# Altium PCB O2 level.PcbDoc
Units mil, origin at the board's own origin, x right, y up, seen from the top; angles counter-clockwise.
Board outline 5000 x 5000 mil, 2 copper layers (Top Layer, Bottom Layer); 23 components, 24 nets, 120 pads, 5 vias.
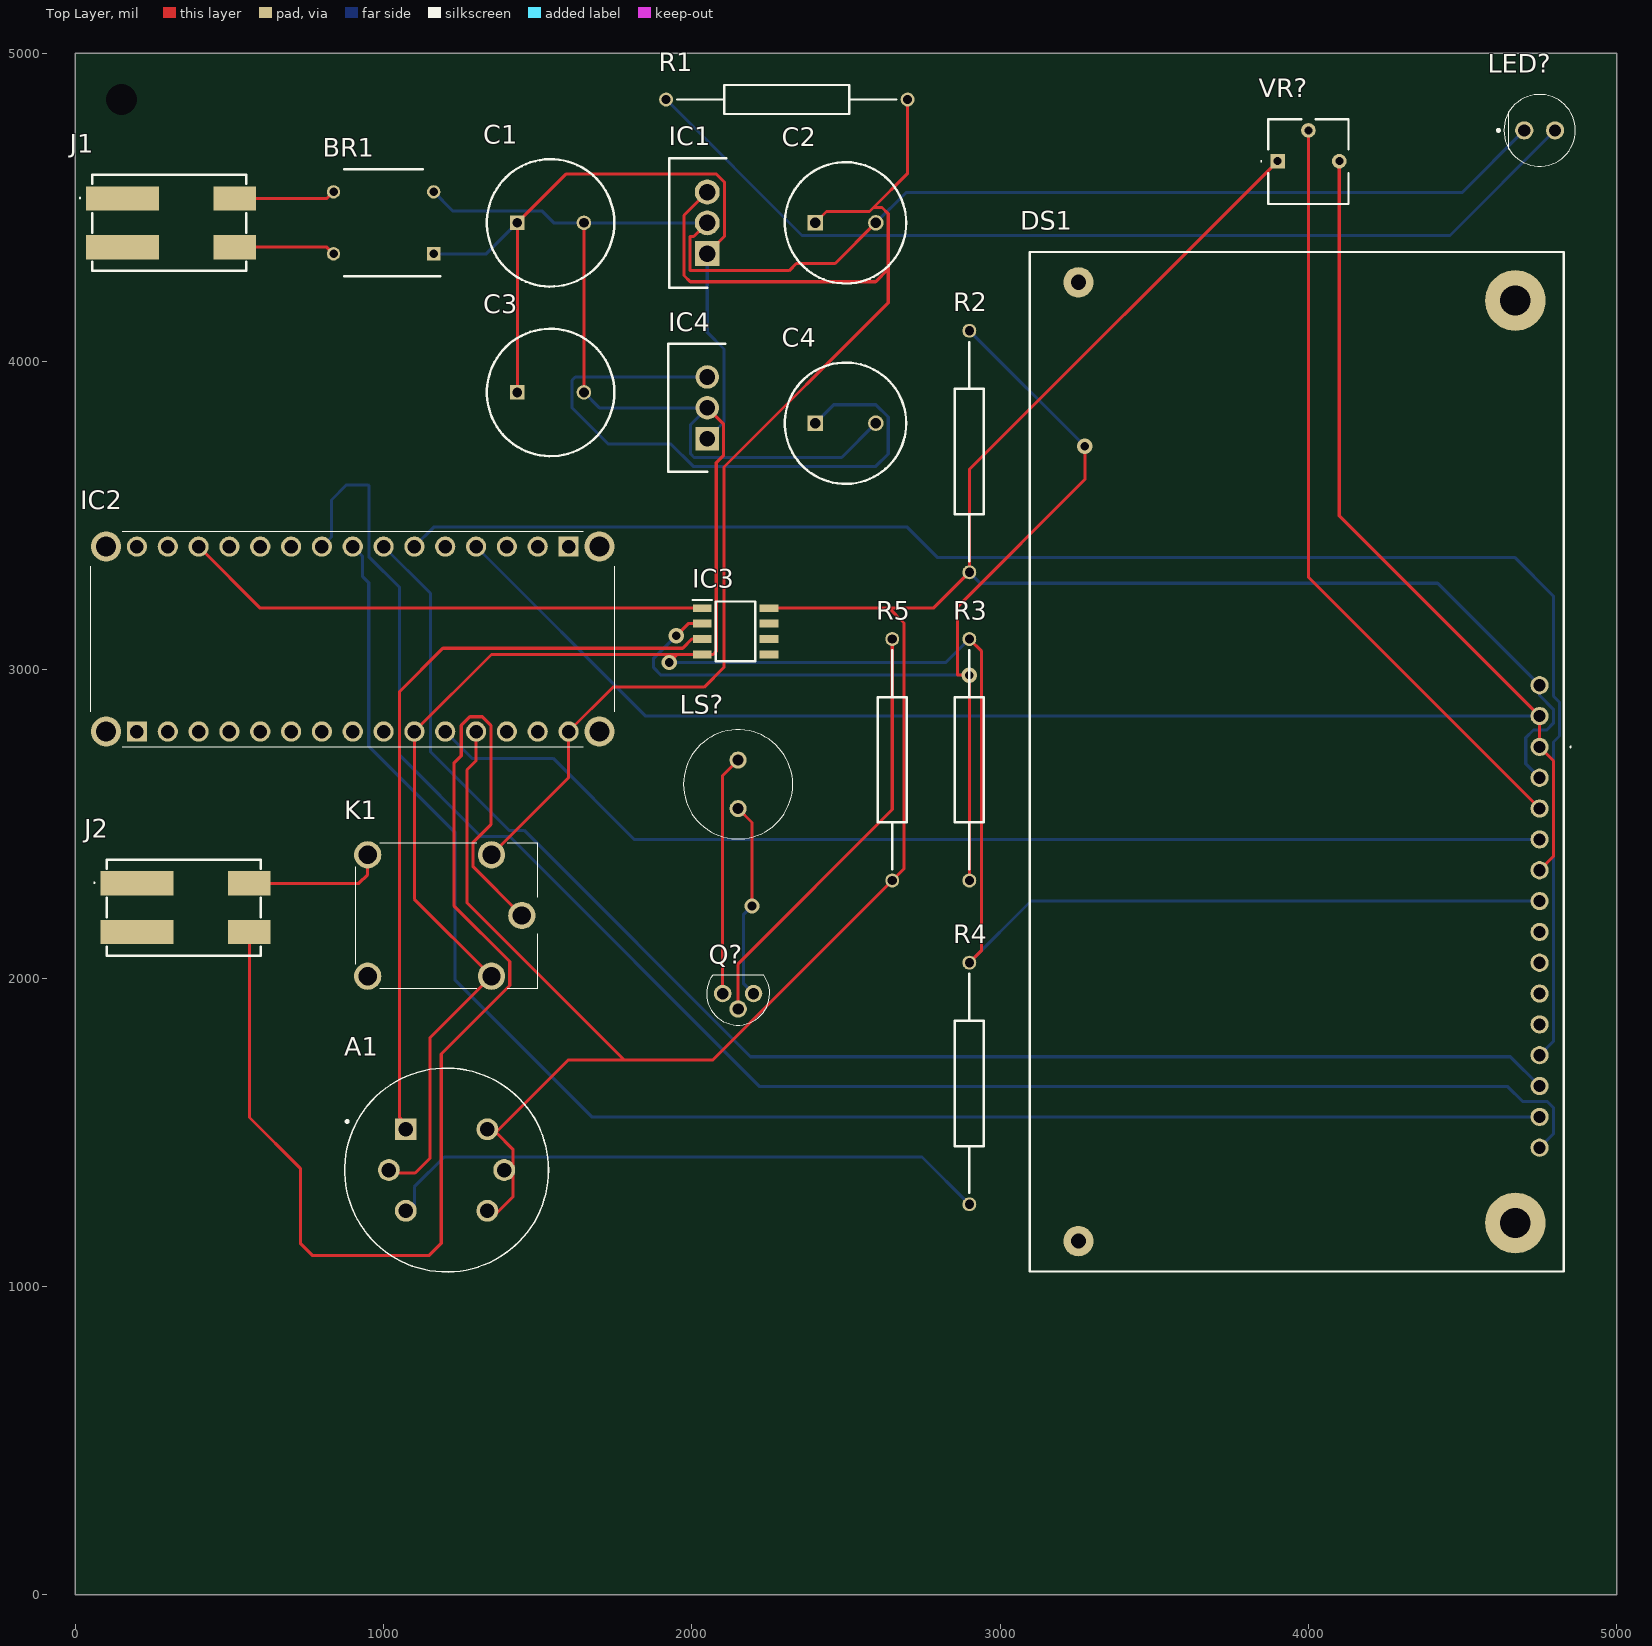
[diagram p0: Top Layer view]
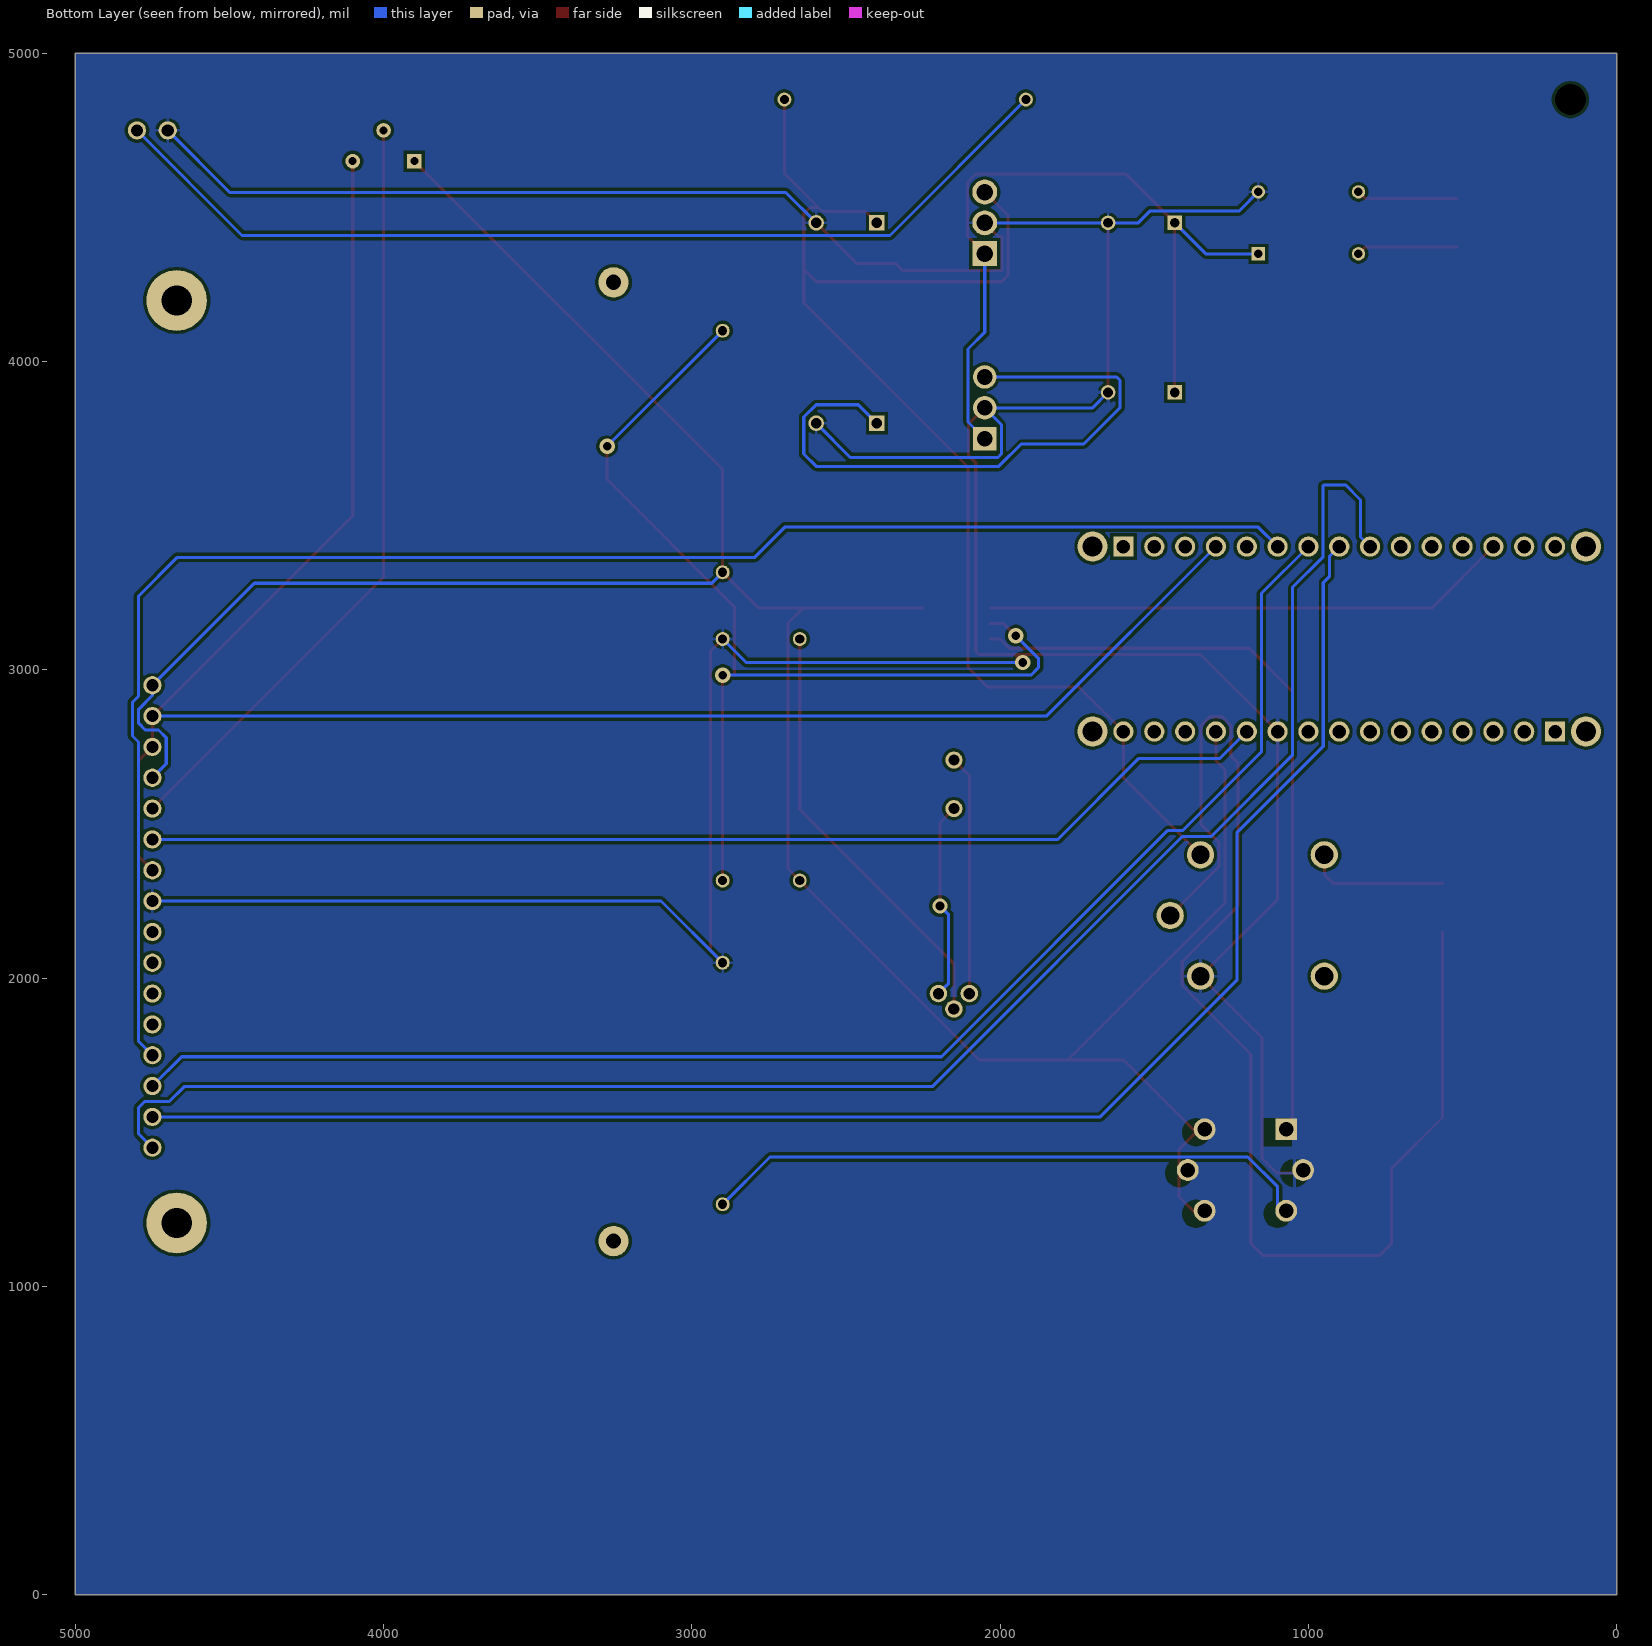
[diagram p1: Bottom Layer view, seen from below]
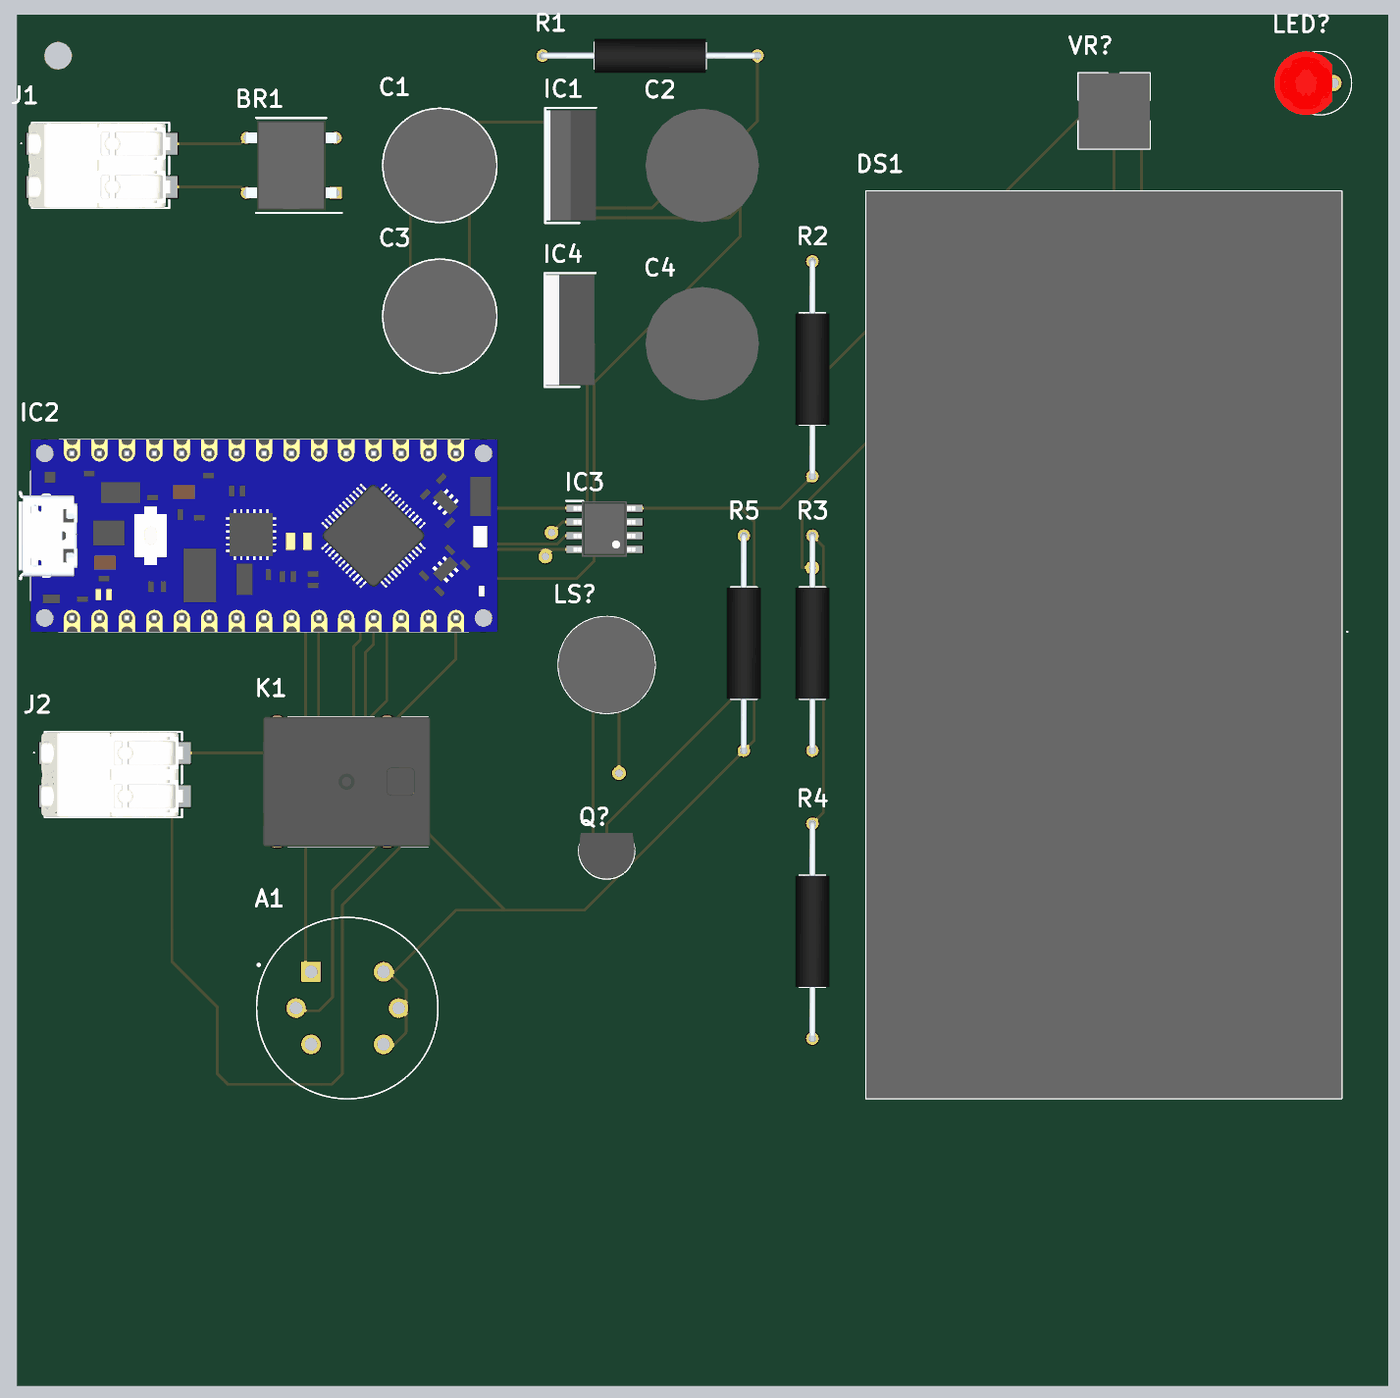
[diagram p2: 3D render of the assembled board from above, using the file's embedded part models]

## Layer stack, top to bottom
Top Solder: solder mask 0.4, Solder Resist, Dk 3.5
Top Layer: signal copper 1.4
Dielectric 1: dielectric 12.6, FR-4, Dk 4.8
Bottom Layer: signal copper 1.4
Bottom Solder: solder mask 0.4, Solder Resist, Dk 3.5

## Board outline
0,0 5000,0 5000,5000 0,5000

## Design rules (kind name [scope] priority, off if disabled: settings)
Clearance [All] p1: gap=10 ignorepadtopadclearanceinfootprint=FALSE except(0: Arc-Hole Track-Hole SMDPad-Hole THPad-Hole Via-Hole Fill-Hole Poly-Hole Region-Hole Text-Hole)
PolygonConnect [All] p1: connectstyle=Relief reliefconductorwidth=10 reliefentries=4 polygonreliefangle="90 Angle" airgapwidth=10
RoutingVias [All] p1: holewidth=28 width=50 viastyle="Through Hole" minholewidth=28 minwidth=50 maxholewidth=28 maxwidth=50
SolderMaskExpansion [All] p1: expansion=4 istentingtop=FALSE
Width [All] p1: maxlimit=10 minlimit=10 preferedwidth=10
30 further rules are at their usual default settings.

## Components (designator, comment, footprint, x,y, rotation, side; value= is the part's Value field where it differs from the comment)
A1 "MQ-7" XDCR_MQ-7 1204.33,1377.53 r0 top
BR1 "DB107" DIP825W50P510L830H340Q4N 1000,4450 r180 top
C1 "1000uf" CAPPRD550W60D1050H2150 1433.46,4450 r0 top
C2 "100uf" CAPPRD500W65D1000H3200 2400,4450 r0 top
C3 "1000uf" CAPPRD550W60D1050H2150 1433.46,3900 r0 top
C4 "100uf" CAPPRD500W65D1000H3200 2400,3800 r0 top
DS1 "162H_DC_BW-3LP" 162HDCBW3LP 4750,2750 r90 top
IC1 "LM7812ACT" TO254P470X1016X2019-3P 2050,4350.2 r90 top
IC2 "ABX00028" ABX00028 200,2800 r0 top
IC3 "LM358M" SOIC127P600X175-8N 2141.73,3125 r0 top
IC4 "LM7805CT" TO254P470X1028X1955-3P 2050,3750 r90 top
J1 "2060-452_998-404" 2060452998404 300,4450 r0 top
J2 "2060-452_998-404" 2060452998404 346.65,2228.74 r0 top (schematic designator J?)
K1 "JJM1-12V" JJM112V 1350,2400 r180 top
LED? "151051RS11000" 151051RS11000 4700,4750 r0 top
LS? "CST-951AP" CST951AP 2150,2707.48 r0 top
Q? "BC547BG" TO-92_(TO-226) 2200,1950 r0 top
R1 "1k" RESAD1987W56L1031D239 2700,4850 r180 top
R2 "1k" RESAD1987W56L1031D239 2900,3316.54 r90 top
R3 "1k" RESAD1987W56L1031D239 2900,2316.54 r90 top
R4 "10k" RESAD1987W56L1031D239 2900,1266.54 r90 top
R5 "10k" RESAD1987W56L1031D239 2650,2316.54 r90 top
VR? "3362P-1-200LF" 3362P1200LF 3900,4650 r0 top

## Footprints (in the part's own frame and the unit in brackets; to place one, negate y for a bottom-side part, rotate by r counter-clockwise, add the part's x,y. Pads: shape width x height; smd on the part's side, far side on the other; paste and mask are expansions set on the pad)
162HDCBW3LP [mm]
  round 1.5 hole 1: 1(0,0) 2(-2.54,0) 3(-5.08,0) 4(-7.62,0) 5(-10.16,0) 6(-12.7,0) 7(-15.24,0) 8(-17.78,0) 9(-20.32,0) 10(-22.86,0) 11(-25.4,0) 12(-27.94,0) 13(-30.48,0) 14(-33.02,0) 15(5.08,0) 16(2.54,0)
  round 2.5 hole 1.25: MH1(-40.72,38) MH2(38.28,38)
  round 5 hole 2.5: MH3(-39.22,2) MH4(36.78,2)
  silkscreen extent -43.22,-2.6 40.78,42, body extent -43.22,-2 40.78,42, height 13.3
3362P1200LF [mm]
  rect 1.21x1.21 hole 0.66: 1(0,0)
  round 1.21 hole 0.66: 2(2.54,2.54) 3(5.08,0)
  silkscreen extent -1.4,-3.53 5.84,3.46, body extent -0.76,-3.53 5.84,3.46, height 5.23
151051RS11000 [mm]
  round 1.5 hole 1: 1(0,0) 2(2.54,0)
  silkscreen extent -2.23,-2.95 4.22,2.95, body extent -2.95,-2.95 2.45,2.95, height 8.7
2060452998404 [mm]
  rect 6x2 smd: 1(-3.725,2) 3(-3.725,-2)
  rect 3.5x2 smd: 2(5.525,2) 4(5.525,-2)
  silkscreen extent -7.27,-3.95 6.48,3.95, body extent -6.55,-3.95 6.55,3.95, height 4.5
ABX00028 [mm]
  rect 1.665x1.665 hole 1.11: A1(0,0) B1(35.56,15.24)
  round 1.665 hole 1.11: A2(2.54,0) A3(5.08,0) A4(7.62,0) A5(10.16,0) A6(12.7,0) A7(15.24,0) A8(17.78,0) A9(20.32,0) A10(22.86,0) A11(25.4,0) A12(27.94,0) A13(30.48,0) A14(33.02,0) A15(35.56,0) B2(33.02,15.24) B3(30.48,15.24) B4(27.94,15.24) B5(25.4,15.24) B6(22.86,15.24) B7(20.32,15.24) B8(17.78,15.24) B9(15.24,15.24) B10(12.7,15.24) B11(10.16,15.24) B12(7.62,15.24) B13(5.08,15.24) B14(2.54,15.24) B15(0,15.24)
  round 2.475 hole 1.65: MH1(-2.54,0) MH2(-2.54,15.24) MH3(38.1,15.24) MH4(38.1,0)
  silkscreen extent -3.81,-1.27 39.37,16.51, body extent -4.94,-1.27 39.39,16.51, height 6
CAPPRD500W65D1000H3200 [mm]
  rect 1.275x1.275 hole 0.85: 1(0,0)
  round 1.275 hole 0.85: 2(5,0)
  silkscreen extent -2.5,-5 7.5,5, body extent -2.73,-5.25 7.75,5.25, height 32
CAPPRD550W60D1050H2150 [mm]
  rect 1.2x1.2 hole 0.8: 1(0,0)
  round 1.2 hole 0.8: 2(5.5,0)
  silkscreen extent -2.5,-5.25 8,5.25, body extent -2.5,-5.24 8,5.24, height 21.5
CST951AP [mm]
  round 1.4 hole 0.9: 1(0,0) 2(0,-4)
  silkscreen extent -4.5,-6.5 4.5,2.5, body extent -4.5,-6.5 4.5,2.5, height 4.6
DIP825W50P510L830H340Q4N [mm]
  rect 1.1x1.1 hole 0.7: 1(-4.125,2.55)
  round 1.1 hole 0.7: 2(-4.125,-2.55) 3(4.125,-2.55) 4(4.125,2.55)
  silkscreen extent -4.68,-4.4 3.25,4.4, body extent -4.25,-4.15 4.25,4.15, height 3.4
JJM112V [mm]
  round 2.25 hole 1.5: 1(0,0) 2(10.2,0) 3(10.2,10) 4(0,10) 5(-2.5,5)
  silkscreen extent -3.8,-1 11.2,11, body extent -3.99,-1 11.51,11, height 12.82
RESAD1987W56L1031D239 [mm]
  round 1.15 hole 0.75: 1(0,0) 2(19.9,0)
  silkscreen extent 0.93,-1.2 18.98,1.2, body extent -0.28,-1.58 20.15,1.58, height 3.18
SOIC127P600X175-8N [mm]
  rect 1.55x0.65 smd: 1(-2.75,1.905) 2(-2.75,0.635) 3(-2.75,-0.635) 4(-2.75,-1.905) 5(2.75,-1.905) 6(2.75,-0.635) 7(2.75,0.635) 8(2.75,1.905)
  silkscreen extent -3.53,-2.46 1.62,2.58, body extent -2.86,-2.57 2.86,2.57, height 1.66
TO254P470X1016X2019-3P [mm]
  rect 2.055x2.055 hole 1.37: 1(0,0)
  round 2.055 hole 1.37: 2(2.535,0) 3(5.07,0)
  silkscreen extent -2.8,-1.55 7.87,3.15, body extent -2.55,-1.55 7.61,3.15, height 18.54
TO254P470X1028X1955-3P [mm]
  rect 1.935x1.935 hole 1.29: 1(0,0)
  round 1.935 hole 1.29: 2(2.54,0) 3(5.08,0)
  silkscreen extent -2.73,-1.5 7.81,3.2, body extent -2.54,-1.43 7.62,3.14, height 19.38
TO-92_(TO-226) [mm]
  round 1.44 hole 0.94: 1(0,0) 2(-1.27,-1.27) 3(-2.54,0)
  silkscreen extent -3.87,-2.6 1.33,1.53, body extent -3.87,-2.51 1.33,1.68, height 8.33
XDCR_MQ-7 [mm]
  rect 1.8x1.8 hole 1.2: 1(-3.359,3.359)
  round 1.8 hole 1.2: 2(-4.75,0) 3(-3.359,-3.359) 4(3.359,-3.359) 5(4.75,0) 6(3.359,3.359)
  silkscreen extent -8.4,-8.4 8.4,8.4

## Part data
A1: "Gas Sensor, High sensitivity to carbon monoxide", Package=Package, Availability=Unavailable, Check_prices=https://www.snapeda.com/parts/MQ-7/Hanwei%20Electronics%20Co.,%20Ltd/view-part/5661821/?ref=eda, MF="Hanwei Electronics Co., Ltd", MP=MQ-7, Price=None, SnapEDA_Link=https://www.snapeda.com/parts/MQ-7/Hanwei%20Electronics%20Co.,%20Ltd/view-part/5661821/?ref=snap
BR1: "Bridge Rectifier", Manufacturer_Name=Rectron, Mouser Part Number=583-DB107, Datasheet Link=https://www.rectron.com/data_sheets/db101-107.pdf, Height=3.4mm, Manufacturer_Part_Number=DB107, Mouser Price/Stock=https://www.mouser.co.uk/ProductDetail/Rectron/DB107?qs=G5AQjGfRJcLGAY%252B6bEDnbw%3D%3D
C1 C3: library part 108CKE025M, "Capacitor Polarised", Manufacturer_Name="Cinch Connectivity Solutions", Datasheet Link=https://componentsearchengine.com/Datasheets/2/108CKE025M.pdf, Height=21.5mm, Manufacturer_Part_Number=108CKE025M
C2 C4: library part EEU-FC2A101L, "Capacitor Polarised", Manufacturer_Name=Panasonic, Mouser Part Number=667-EEU-FC2A101L, Arrow Part Number=EEU-FC2A101L, Arrow Price/Stock=https://www.arrow.com/en/products/eeu-fc2a101l/panasonic?region=nac, Datasheet Link=http://industrial.panasonic.com/cdbs/www-data/pdf/RDF0000/ABA0000C1209.pdf, Height=32mm, Manufacturer_Part_Number=EEU-FC2A101L, Mouser Price/Stock=https://www.mouser.co.uk/ProductDetail/Panasonic/EEU-FC2A101L?qs=MtOUKumLmnYYrYsMGpDvcw%3D%3D
DS1: "Display", Manufacturer_Name=Displaytech, Manufacturer_Part_Number="162H DC BW-3LP", Mouser Part Number=758-162HDCBW3LP, Datasheet Link=https://www.mouser.com/datasheet/2/1015/162H-DC-BW-3LP-Displaytech-Spec-1664822.pdf, Height=13.2mm, Mouser Price/Stock=https://www.mouser.co.uk/ProductDetail/Displaytech/162H-DC-BW-3LP?qs=PzGy0jfpSMu9Pu07wP3dWg%3D%3D
IC1: "Integrated Circuit", Manufacturer_Name=onsemi, Mouser Part Number=512-LM7812ACT, Arrow Part Number=LM7812ACT, Arrow Price/Stock=https://www.arrow.com/en/products/lm7812act/on-semiconductor, Datasheet Link=https://datasheet.datasheetarchive.com/originals/distributors/Datasheets_SAMA/704b005d7d2d9ced5864f40b6609c1bc.pdf, Height=4.7mm, Manufacturer_Part_Number=LM7812ACT, Mouser Price/Stock=https://www.mouser.com/Search/Refine.aspx?Keyword=512-LM7812ACT
IC2: "Integrated Circuit", Manufacturer_Name=Arduino, Mouser Part Number=782-ABX00028, Arrow Part Number=ABX00028, Arrow Price/Stock=https://www.arrow.com/en/products/abx00028/arduino-corporation?region=nac, Datasheet Link=https://store.arduino.cc/arduino-nano-every, Height=10mm, Manufacturer_Part_Number=ABX00028, Mouser Price/Stock=https://www.mouser.co.uk/ProductDetail/Arduino/ABX00028?qs=PzGy0jfpSMtit6rnFl8mVg%3D%3D
IC3: "Integrated Circuit", Manufacturer_Name=onsemi, Mouser Part Number=512-LM358M, Arrow Part Number=LM358M, Arrow Price/Stock=https://www.arrow.com/en/products/lm358m/on-semiconductor, Datasheet Link=https://www.onsemi.com/pub/Collateral/LM358A-D.pdf, Height=1.75mm, Manufacturer_Part_Number=LM358M, Mouser Price/Stock=https://www.mouser.co.uk/ProductDetail/onsemi-Fairchild/LM358M?qs=M37yUtvuNLzx7IpRziQN1g%3D%3D
IC4: "Integrated Circuit", Manufacturer_Name="Texas Instruments", Mouser Part Number=926-LM7805CT, Arrow Part Number=LM7805CT, Arrow Price/Stock=https://www.arrow.com/en/products/lm7805ct/texas-instruments?region=europe, Datasheet Link=http://www.ti.com/lit/ds/symlink/lm340.pdf, Height=4.7mm, Manufacturer_Part_Number=LM7805CT, Mouser Price/Stock=https://www.mouser.co.uk/ProductDetail/Texas-Instruments/LM7805CT?qs=QbsRYf82W3EaqXeMDVwIfQ%3D%3D
J1 J2: "Connector", Arrow Part Number=2060-452/998-404, Manufacturer_Name=Wago, Arrow Price/Stock=https://www.arrow.com/en/products/2060-452998-404/wago-kontakttechnik-gmbh?region=nac, Datasheet Link=https://www.wago.com/2060-452/998-404, Height=4.5mm, Manufacturer_Part_Number=2060-452/998-404
K1: "Relay or Contactor", Manufacturer_Name=Panasonic, Mouser Part Number=769-JJM1-12V, Arrow Part Number=JJM1-12V, Arrow Price/Stock=https://www.arrow.com/en/products/jjm1-12v/panasonic?region=nac, Datasheet Link=https://www.panasonic-electric-works.com/cps/rde/xbcr/pew_eu_en/ds_61210_en_jjm.pdf, Height=14.2mm, Manufacturer_Part_Number=JJM1-12V, Mouser Price/Stock=https://www.mouser.co.uk/ProductDetail/Panasonic-Industrial-Devices/JJM1-12V?qs=UO%2Fx91QLkSB08I34A9%2FECg%3D%3D
LED?: "LED", Manufacturer_Name="Wurth Elektronik", Mouser Part Number=710-151051RS11000, Datasheet Link=https://katalog.we-online.com/led/datasheet/151051RS11000.pdf, Height=13.6mm, Manufacturer_Part_Number=151051RS11000, Mouser Price/Stock=https://www.mouser.co.uk/ProductDetail/Wurth-Elektronik/151051RS11000?qs=LlUlMxKIyB0NuMCRBgVmEg%3D%3D
LS?: "Loudspeaker or Buzzer", Manufacturer_Name="CUI Devices", Mouser Part Number=490-CST-951AP, Arrow Part Number=CST-951AP, Arrow Price/Stock=https://www.arrow.com/en/products/cst-951ap/cui-devices?region=nac, Datasheet Link=https://datasheet.datasheetarchive.com/originals/distributors/Datasheets-45/DSA-14132.pdf, Height=4.5mm, Manufacturer_Part_Number=CST-951AP, Mouser Price/Stock=https://www.mouser.co.uk/ProductDetail/CUI-Devices/CST-951AP?qs=WyjlAZoYn50BV9%2FINsWxoA%3D%3D
Q?: "Transistor BJT NPN", Manufacturer_Name=onsemi, Mouser Part Number=N/A, Arrow Part Number=BC547BG, Arrow Price/Stock=http://www.arrow.com/en/products/bc547bg/on-semiconductor, Datasheet Link=https://datasheet.datasheetarchive.com/originals/distributors/Datasheets-23/DSA-455923.pdf, Height=5.33mm, Manufacturer_Part_Number=BC547BG, Mouser Price/Stock=http://www.mouser.com/Search/ProductDetail.aspx?qs=NSmgnqlvnz5NIKIycfR5CQ%3d%3d
R1 R2 R3 R4 R5: library part RS01A1R000FE12, "Resistor", Manufacturer_Name=Vishay, Mouser Part Number=71-RS01A1R000FE12, Arrow Part Number=RS01A1R000FE12, Arrow Price/Stock=https://www.arrow.com/en/products/rs01a1r000fe12/vishay?region=nac, Datasheet Link=http://www.mouser.com/ds/2/427/rsns-226497.pdf, Manufacturer_Part_Number=RS01A1R000FE12, Mouser Price/Stock=https://www.mouser.co.uk/ProductDetail/Vishay-Dale/RS01A1R000FE12?qs=pX8%252BLszEE6SqU%2F4VU%252B6gEw%3D%3D
VR?: "Variable Resistor", Manufacturer_Name=Bourns, Mouser Part Number=652-3362P-1-200LF, Datasheet Link=https://www.bourns.com/docs/product-datasheets/3362.pdf, Height=5.13mm, Manufacturer_Part_Number=3362P-1-200LF, Mouser Price/Stock=https://www.mouser.co.uk/ProductDetail/Bourns/3362P-1-200LF?qs=3URE%2FKQzLzdGi9F779EtTA%3D%3D

## Free pads (board coordinates)
  round 60 hole 100: 5(150,4850)

## Via types
v1: diameter 50, hole 28, Top Layer to Bottom Layer, 5 vias

## Nets (pads, with @x,y where several pads share a name; then routed paths per layer and width w, separated by ;. In a path a pad name is that pad's centre, name@x,y a point inside that pad or via, vN(x,y) a via of type N, cw(c..) or ccw(c..) an arc to the next point about the centre after c; other vN are vias at no path point)
GND: A1.2 BR1.2 C1.2 C2.2 C3.2 C4.2 DS1.6 IC1.2 IC2.A10 IC3.4 IC4.2 K1.4 LED?.1 R3.2 R4.2 | length 13463.7
  Top Layer w10: A1.2@1045.23,1367.77 1102.23,1367.77 1151,1416.53 1151,1807.3 K1.4 1100,2256.3 IC2.A10 1350,3050 1953,3050 ; C3.2 C1.2 ; v1(1927,3024) 1953,3050 ; IC4.2 2103.09,3796.91 2103.09,3696 2079,3671.91 2079,3060 2069,3050 IC3.4 1953,3050 ; IC1.2 2005.65,4405.65 1994.55,4405.65 1994.55,4294.74 2315.74,4294.74 2339,4318 2464.85,4318 C2.2 ; R4.2 2940,2090 2940,3060 R3.2
  Bottom Layer w10: BR1.2 1223.8,4489 1513,4489 1552,4450 C1.2 IC1.2 ; C3.2 1700,3850 IC4.2 1996,3796 1996,3700 2007,3689 2485.85,3689 C4.2 ; v1(1927,3024) 2824,3024 R3.2 ; C2.2 2694.85,4548 4498,4548 LED?.1 ; R4.2 3100,2250 DS1.6
NetA1_1: A1.1 IC3.3 | length 2501.8
  Top Layer w10: A1.1@1100,1500 1052,1548 1052,2930 1192.16,3070.16 1970,3070.16 1999.84,3100 IC3.3
NetA1_3: A1.3 R4.1 | length 1991.2
  Bottom Layer w10: A1.3@1100,1235.53 1100,1323 1197,1420 2746.54,1420 R4.1
NetA1_4: A1.4 A1.5 A1.6 DS1.2 DS1.15 IC2.A12 IC3.8 R2.1 R5.1 VR?.1 | length 8988.9
  Top Layer w10: IC2.A12 1300,2705 1270.71,2675.71 1270.71,2244.29 1780.71,1734.29 ; A1.4@1364.47,1235.53 1419.24,1290.3 1419.24,1367.77 1419.24,1445.23 1364.47,1500 1598.76,1734.29 1780.71,1734.29 ; IC3.8 2640,3200 ; VR?.1 2900,3650 R2.1 2783.46,3200 2640,3200 ; 1780.71,1734.29 2067.76,1734.29 R5.1 2688,2354.54 2688,3152 2640,3200
  Bottom Layer w10: R2.1 2935.54,3281 4419,3281 DS1.15 4750,2917 4794.53,2872.47 4794.53,2826.53 4773,2805 4730,2805 4705,2780 4705,2695 DS1.2
NetBR1_1: BR1.1 C1.1 C3.1 IC1.1 IC4.1 | length 2511.8
  Top Layer w10: C3.1 1434,3900.54 1434,4449.46 C1.1 1591.46,4608 2080,4608 2106,4582 2106,4406.2 IC1.1
  Bottom Layer w10: BR1.1 1333.07,4349.61 C1.1 ; IC4.1 2104,3804 2104,4041 2050,4095 IC1.1
NetBR1_3: BR1.3 J1.2 | length 329
  Top Layer w10: J1.2 815.94,4528.74 BR1.3
NetBR1_4: BR1.4 J1.4 | length 329
  Top Layer w10: J1.4 815.94,4371.26 BR1.4
NetC2_1: C2.1 IC1.3 IC2.A15 K1.1 R1.1 | length 4438
  Top Layer w10: K1.1 1600,2650 IC2.A15 1744,2944 2040,2944 2104,3008 2104,3657.82 2637,4190.82 2637,4300 ; IC1.3 1974.55,4474.35 1974.55,4279.45 1995,4259 2596,4259 2637,4300 ; C2.1 2437,4487 2576,4487 2589,4500 ; R1.1 2700,4611 2589,4500 ; 2589,4500 2617,4500 2637,4480 2637,4300
NetC4_1: C4.1 IC4.3 | length 2052.2
  Bottom Layer w10: IC4.3 1622,3950 1611,3939 1611,3850 1728,3733 1931,3733 2004,3660 2597,3660 2637,3700 2637,3820 2597,3860 2460,3860 C4.1
NetDS1_1: DS1.1 DS1.5 DS1.16 IC2.B4 VR?.3 | length 6284.3
  Top Layer w10: VR?.3 4100,3500 DS1.16 DS1.1 4795,2705 4795,2395 DS1.5
  Bottom Layer w10: IC2.B4 1850,2850 DS1.16
NetDS1_3: DS1.3 VR?.2 | length 2510.7
  Top Layer w10: VR?.2 4000,3300 DS1.3
NetDS1_4: DS1.4 IC2.A11 | length 3695
  Bottom Layer w10: IC2.A11 1287,2713 1550,2713 1813,2450 DS1.4
NetDS1_11: DS1.11 IC2.B6 | length 5338.5
  Bottom Layer w10: IC2.B6 1164,3464 2697,3464 2796,3365 4669,3365 4795,3239 4795,2914.53 4814.53,2895 4814.53,2785.47 4795,2765.94 4795,1795 DS1.11
NetDS1_12: DS1.12 IC2.B7 | length 4776
  Bottom Layer w10: IC2.B7 1152,3248 1152,2734 1406.71,2479.29 1455.94,2479.29 2190.23,1745 4655,1745 DS1.12
NetDS1_13: DS1.13 IC2.B8 | length 5246
  Bottom Layer w10: IC2.B8 932.22,3367.78 932.22,3302.35 952,3282.57 952,2752 1232,2472 1232,1993 1675,1550 DS1.13
NetDS1_14: DS1.14 IC2.B9 | length 5587.5
  Bottom Layer w10: IC2.B9 831,3431 831,3551 880,3600 950,3600 952.22,3597.78 952.22,3366.78 1052,3267 1052,2723 1315.71,2459.29 1409,2459.29 2220.29,1648 4647,1648 4695,1600 4775,1600 4795,1580 4795,1495 DS1.14
NetIC2_B13: IC2.B13 IC3.1 | length 1716.3
  Top Layer w10: IC2.B13 600,3200 IC3.1
NetIC3_2: IC3.2 R2.2 R3.1 | length 3416.7
  Top Layer w10: v1(1949,3111) 1988,3150 IC3.2 ; R3.1 v1(2900,2983) 2862,2983 2862,3205 3275,3618 v1(3275,3725)
  Bottom Layer w10: v1(1949,3111) 1876,3038 1876,3007 1900,2983 v1(2900,2983) ; R2.2 v1(3275,3725)
NetJ?_2: J2.2 K1.2 | length 460.1
  Top Layer w10: J2.2 920,2307.48 948.43,2335.91 K1.2
NetJ?_4: J2.4 K1.5 | length 4251.5
  Top Layer w10: J2.4 565,2150 565,1548 730,1383 730,1140 770,1100 1147,1100 1187,1140 1187,1754 1409.29,1976.29 1409.29,2053.71 1228,2235 1228,2697 1252,2721 1252,2820 1280,2848 1320,2848 1348,2820 1348,2498 1290.71,2440.71 1290.71,2360.87 K1.5
NetLED?_2: LED?.2 R1.2 | length 3207.4
  Bottom Layer w10: R1.2 2357.54,4409 4459,4409 LED?.2
NetLS?_1: LS?.1 Q?.3 | length 778.2
  Top Layer w10: Q?.3 2100,2657.48 LS?.1
NetLS?_2: LS?.2 Q?.1 | length 643.9
  Top Layer w10: LS?.2 2195,2505 v1(2195,2234)
  Bottom Layer w10: v1(2195,2234) 2167,2206 2167,1983 Q?.1
NetQ?_2: Q?.2 R5.2 | length 1407.1
  Top Layer w10: Q?.2 2150,2047 2650,2547 R5.2
pads on no net: DS1.7 DS1.8 DS1.9 DS1.10 DS1.MH1 DS1.MH2 DS1.MH3 DS1.MH4 IC2.A1 IC2.A2 IC2.A3 IC2.A4 IC2.A5 IC2.A6 IC2.A7 IC2.A8 IC2.A9 IC2.A13 IC2.A14 IC2.B1 IC2.B2 IC2.B3 IC2.B5 IC2.B10 IC2.B11 IC2.B12 IC2.B14 IC2.B15 IC2.MH1 IC2.MH2 IC2.MH3 IC2.MH4 IC3.5 IC3.6 IC3.7 J1.1 J1.3 J2.1 J2.3 K1.3

## Polygon pours and split planes (outlines as drawn)
GND on Bottom Layer "GND_L02_P003" (solid, pour order 3): 0,5000 5000,5000 5000,0 0,0